# Altium PCB tekprobe.PcbDoc (part 2 of 2)
Units mm, origin at the board's own origin, x right, y up, seen from the top; angles counter-clockwise.
Board outline 60 x 55 mm, 2 copper layers (Top Layer, Bottom Layer), stack 1.572 mm thick; 47 components, 34 nets, 159 pads, 92 vias.
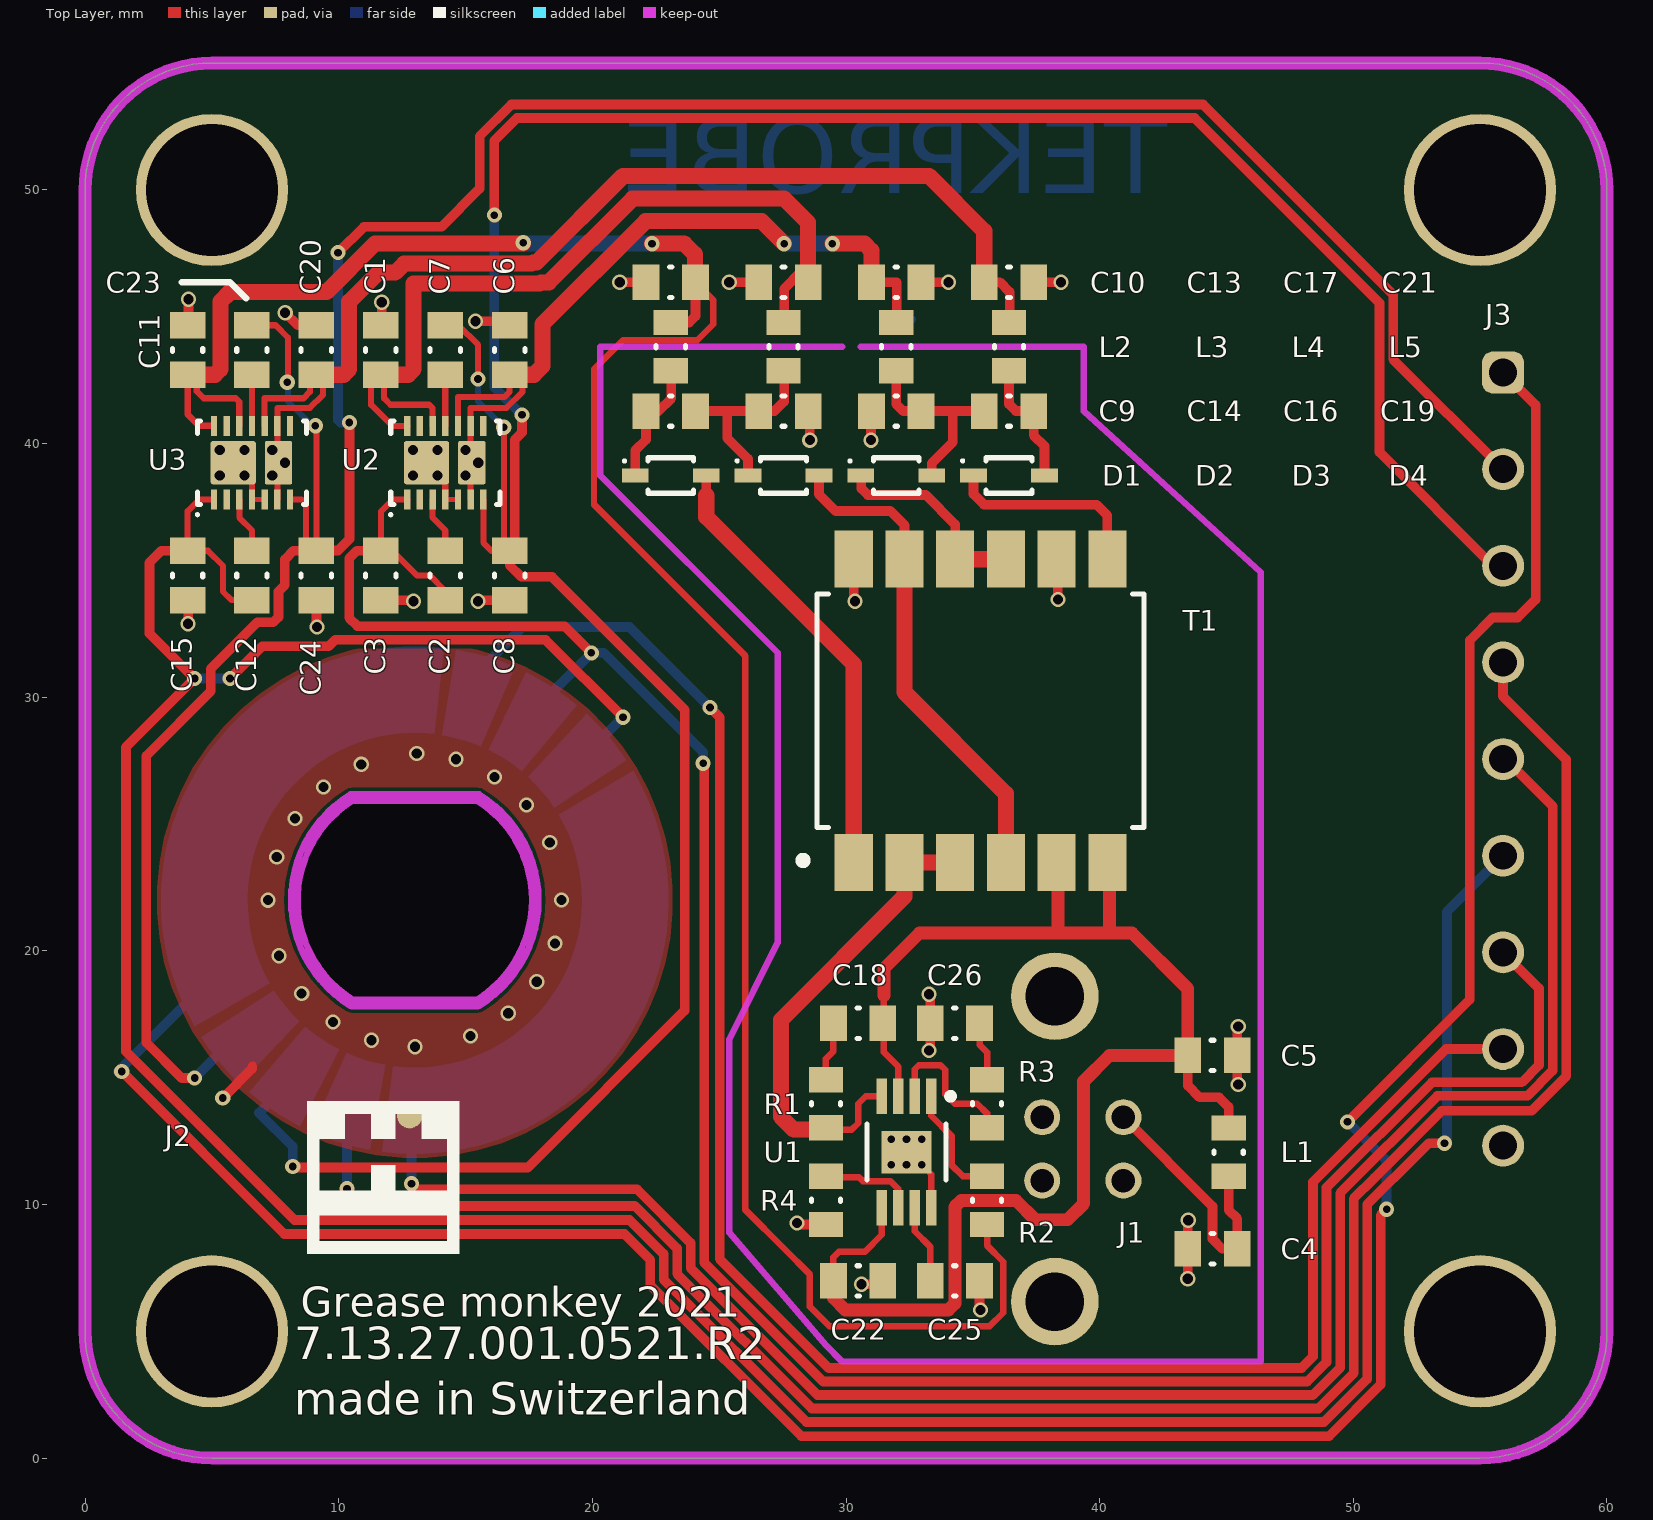
[diagram p0: Top Layer view]

## Keep-outs (continued)
Keep-Out Layer: (continued)
  lines w0.254: 29.845,43.815 20.32,43.815 20.32,38.735 27.305,31.75 27.305,20.32 25.4,16.51 25.4,8.89 29.21,4.445 29.845,3.81 46.355,3.81 46.355,34.925 39.37,41.275 39.37,43.815 30.58,43.815 ; 0.127,4.999 ccw(c0,4.999) 0.127,4.999 ; 0.127,4.999 ccw(c0,4.999) 0.127,4.999 ; 0.127,4.999 ccw(c4.999,4.999) 4.998,0.127 ; 0.127,4.999 0.127,50.001 ; 0.127,50.001 cw(c4.999,50.001) 4.998,54.873 ; 0.127,50.001 ccw(c0,50.001) 0.127,50.001 ; 0.127,50.001 ccw(c0,50.001) 0.127,50.001 ; 4.998,0.127 cw(c4.999,0) 4.999,0.127 ; 4.998,0.127 cw(c4.999,0) 4.999,0.127 ; 4.998,0.127 ccw(c4.999,4.999) 4.999,0.127 ; 4.998,54.873 ccw(c4.999,55) 4.999,54.873 ; 4.998,54.873 ccw(c4.999,55) 4.999,54.873 ; 4.998,54.873 cw(c4.999,50.001) 4.999,54.873 ; 4.999,-0.127 ccw(c4.999,0) 5,-0.127 ; 4.999,-0.127 ccw(c4.999,0) 5,-0.127 ; 4.999,-0.127 cw(c4.999,4.999) -0.127,4.999 -0.127,50.001 cw(c4.999,50.001) 4.999,55.127 ; 5,-0.127 55.001,-0.127 ccw(c55.001,4.999) 60.127,4.999 ; 4.999,-0.127 5,-0.127 ; 4.999,0.127 ccw(c4.999,0) 4.999,0.127 ; 4.999,0.127 55.001,0.127 ; 4.999,54.873 ccw(c4.999,55) 4.999,54.873 ; 4.999,54.873 55.001,54.873 ; 5,55.127 ccw(c4.999,55) 4.999,55.127 ; 5,55.127 ccw(c4.999,55) 4.999,55.127 ; 5,55.127 55.001,55.127 cw(c55.001,50.001) 60.127,50.001 ; 4.999,55.127 5,55.127 ; 55.001,0.127 ccw(c55.001,4.999) 59.873,4.999 ; 55.001,0.127 ccw(c55.001,0) 55.001,0.127 ; 55.001,0.127 ccw(c55.001,0) 55.001,0.127 ; 55.001,54.873 ccw(c55.001,55) 55.001,54.873 ; 55.001,54.873 cw(c55.001,50.001) 59.873,50.001 ; 55.001,54.873 ccw(c55.001,55) 55.001,54.873 ; 59.873,4.999 ccw(c60,4.999) 59.873,4.999 ; 59.873,4.999 ccw(c60,4.999) 59.873,4.999 ; 59.873,4.999 ccw(c55.001,4.999) 59.873,5.003 ; 59.873,4.999 ccw(c55.001,4.999) 59.873,4.999 ; 59.873,4.999 ccw(c55.001,4.999) 59.873,4.999 ; 59.873,4.999 59.873,5.003 ; 59.873,4.999 59.873,5.003 ; 59.873,5.003 cw(c60,5.003) 59.873,5.003 ; 59.873,5.003 cw(c60,5.003) 59.873,5.003 ; 59.873,5.003 59.873,50.001 ; 59.873,50.001 ccw(c60,50.001) 59.873,50.001 ; 59.873,50.001 ccw(c55.001,50.001) 59.873,50.001 ; 59.873,50.001 ccw(c60,50.001) 59.873,50.001 ; 60.127,4.999 ccw(c55.001,4.999) 60.127,5.003 ; 60.127,4.999 ccw(c55.001,4.999) 60.127,4.999 ; 60.127,4.999 ccw(c60,4.999) 60.127,4.999 ; 60.127,4.999 ccw(c60,4.999) 60.127,4.999 ; 60.127,4.999 60.127,50.001 ; 60.127,4.999 60.127,4.999 ; 60.127,4.999 60.127,5.003 ; 60.127,5.003 ccw(c60,5.003) 60.127,5.003 ; 60.127,50.001 ccw(c55.001,50.001) 60.127,50.001 ; 10.452,17.842 cw(c13,22) 10.452,26.158 cw(c10.518,26.05) 10.518,26.177 15.482,26.177 cw(c15.482,26.05) 15.548,26.158 cw(c13,22) 17.877,22 cw(c13,22) 15.548,17.842 cw(c15.482,17.95) 15.482,17.823 10.518,17.823 cw(c10.518,17.95) 10.452,17.842 ; 10.554,18.077 cw(c13,22) 10.554,25.923 15.446,25.923 cw(c13,22) 17.623,22 cw(c13,22) 15.446,18.077 10.554,18.077

## Other copper
Bottom Layer:
  text "TEKPROBE" at 42.672,48.895 h5.08

## Silkscreen, mask and mechanical layers (free items; w line width, h text height)
Top Overlay:
  pour cut-out: 9.255,9.565 9.255,8.565 14.255,8.565 14.255,9.565
  pour cut-out: 9.255,12.565 10.255,12.565 10.255,13.565 11.255,13.565 11.255,12.565 12.255,12.565 12.255,13.565 13.255,13.565 13.255,12.565 14.255,12.565 14.255,10.565 12.255,10.565 12.255,11.565 11.255,11.565 11.255,10.565 9.255,10.565 9.255,11.565
  lines w0.254: 3.81,46.355 5.08,46.355 5.715,46.355 6.35,45.72
  text "Grease monkey 2021" at 8.5,5.176 h2.03
  text "7.13.27.001.0521.R2 / made in Switzerland" at 8.255,1.27 h2.2
Bottom Overlay:
  pour cut-out: 44.815,50.665 45.815,50.665 45.815,51.665 46.815,51.665 46.815,50.665 47.815,50.665 47.815,51.665 48.815,51.665 48.815,50.665 49.815,50.665 49.815,48.665 47.815,48.665 47.815,49.665 46.815,49.665 46.815,48.665 44.815,48.665 44.815,49.665
  pour cut-out: 44.815,47.665 44.815,46.665 49.815,46.665 49.815,47.665
  text "USB power supply" at 42.672,46.109 h3.43
  text "DATA" at 51.585,42.127 h2.03
  text "-15V" at 51.585,38.317 h2.03
  text "-5V" at 51.585,34.507 h2.03
  text "OFFSET" at 51.585,30.697 h2.03
  text "DATA" at 51.585,26.887 h2.03
  text "+15V" at 51.585,23.077 h2.03
  text "+5V" at 51.585,19.267 h2.03
  text "CLOCK" at 51.585,15.457 h2.03
  text "GND" at 51.585,11.647 h2.03
Bottom Solder:
  text "TEKPROBE" at 42.672,48.954 h5.08
Board Cut Out:
  lines w0.001: 10.518,26.049 ccw(c13,22) 10.518,17.951 ; 15.482,26.049 cw(c13,22) 17.749,22 cw(c13,22) 15.482,17.951 ; 55.001,55.001 4.999,55.001 ; 4.999,-0.001 cw(c4.999,4.999) -0.001,4.999 -0.001,50.001 cw(c4.999,50.001) 4.999,55.001 ; 4.999,0.001 cw(c4.999,4.999) 0.001,4.999 0.001,50.001 cw(c4.999,50.001) 4.999,54.999 ; 4.999,0.001 ccw(c4.999,0) 4.999,0.001 ; 4.999,0.001 ccw(c4.999,0) 4.999,0.001 ; 4.999,-0.001 ccw(c4.999,0) 4.999,-0.001 ; 4.999,-0.001 ccw(c4.999,0) 4.999,-0.001 ; 4.999,-0.001 ccw(c4.999,0) 4.999,-0.001 ; 4.999,0.001 ccw(c4.999,0) 4.999,0.001 ; 4.999,0.001 55.001,0.001 ; 4.999,-0.001 55.001,-0.001 ; 4.999,-0.001 4.999,-0.001 ; 4.999,-0.001 4.999,-0.001 ; 4.999,54.999 ccw(c4.999,55) 4.999,54.999 ; 4.999,54.999 ccw(c4.999,55) 4.999,54.999 ; 4.999,54.999 ccw(c4.999,55) 4.999,54.999 ; 4.999,54.999 55.001,54.999 ; 4.999,55.001 ccw(c4.999,55) 4.999,55.001 ; 4.999,55.001 ccw(c4.999,55) 4.999,55.001 ; 4.999,55.001 ccw(c4.999,55) 4.999,55.001 ; 4.999,55.001 ccw(c4.999,50.001) 4.999,55.001 ; 4.999,55.001 4.999,55.001 ; 4.999,55.001 4.999,55.001 ; 10.518,17.95 cw(c13,22) 10.518,26.05 ; 10.518,17.95 ccw(c10.518,17.95) 10.518,17.949 15.482,17.949 ccw(c15.482,17.95) 15.482,17.95 ; 10.518,26.051 ccw(c10.518,26.05) 10.518,26.05 ; 10.518,26.051 15.482,26.051 ; 15.482,17.95 ccw(c13,22) 17.751,22 ccw(c13,22) 15.482,26.05 ; 15.482,26.05 ccw(c15.482,26.05) 15.482,26.051 ; 55.001,-0.001 ccw(c55.001,4.999) 60.001,4.999 ; 55.001,0.001 ccw(c55.001,4.999) 59.999,4.999 ; 55.001,55.001 cw(c55.001,50.001) 60.001,50.001 ; 55.001,54.999 cw(c55.001,50.001) 59.999,50.001 ; 59.999,4.999 ccw(c55.001,4.999) 59.999,5.003 ; 59.999,4.999 ccw(c55.001,4.999) 59.999,4.999 ; 59.999,4.999 59.999,5.003 ; 59.999,4.999 59.999,5.003 ; 59.999,5.003 ccw(c60,5.003) 59.999,5.003 ; 59.999,5.003 ccw(c60,5.003) 59.999,5.003 ; 59.999,5.003 59.999,50.001 ; 59.999,50.001 ccw(c55.001,50.001) 59.999,50.001 ; 60.001,4.999 ccw(c55.001,4.999) 60.001,5.003 60.001,4.999 ; 60.001,4.999 ccw(c55.001,4.999) 60.001,4.999 ; 60.001,4.999 60.001,50.001 ; 60.001,50.001 ccw(c55.001,50.001) 60.001,50.001
Mechanical 11:
  circle w0.025: c13,22 r10.16